# Altium PCB Final decision.PcbDoc
Units mm, origin at the board's own origin, x right, y up, seen from the top; angles counter-clockwise.
Board outline 59.9 x 74 mm, 2 copper layers (Top Layer, Bottom Layer); 53 components, 47 nets, 199 pads, 42 vias.
Unrouted connection lines stored in the file: 110.
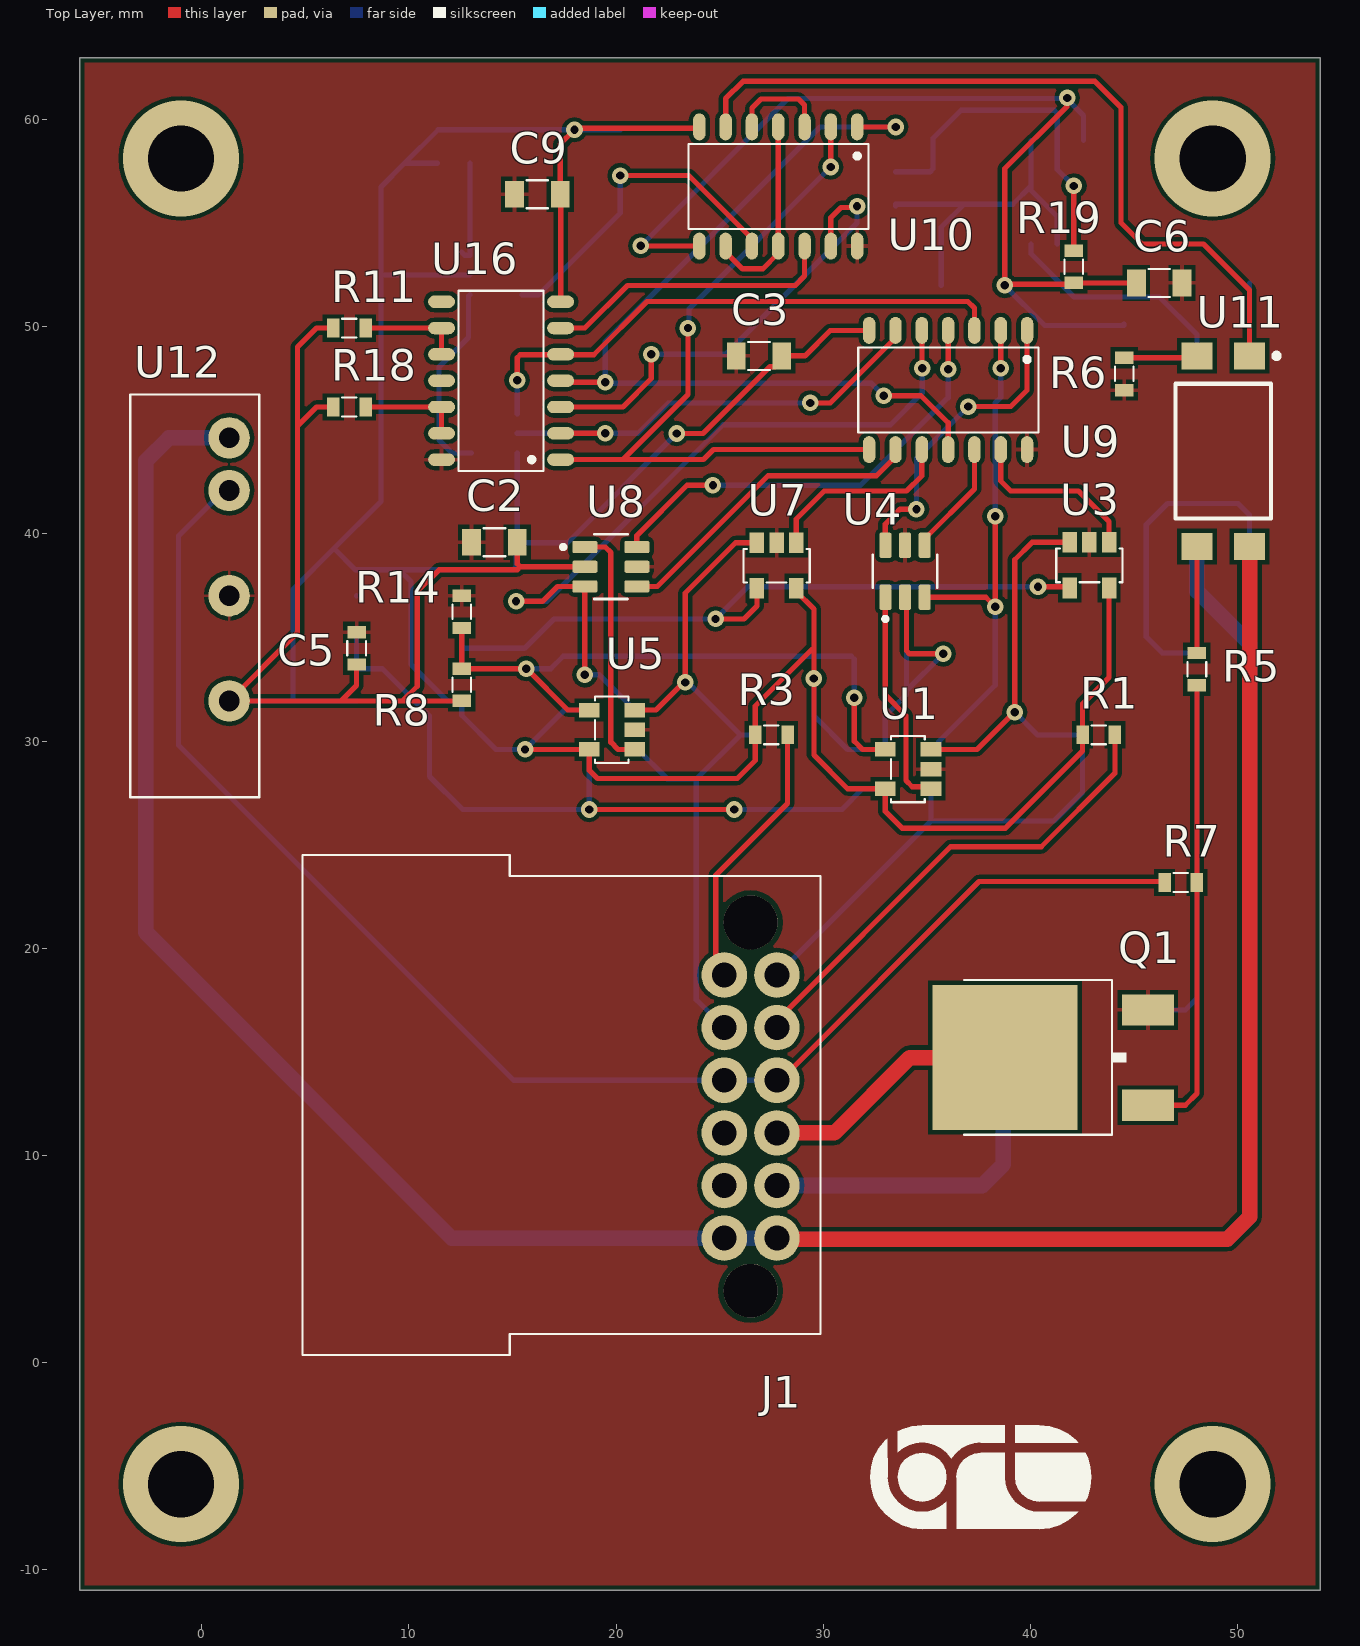
[diagram p0: Top Layer view]
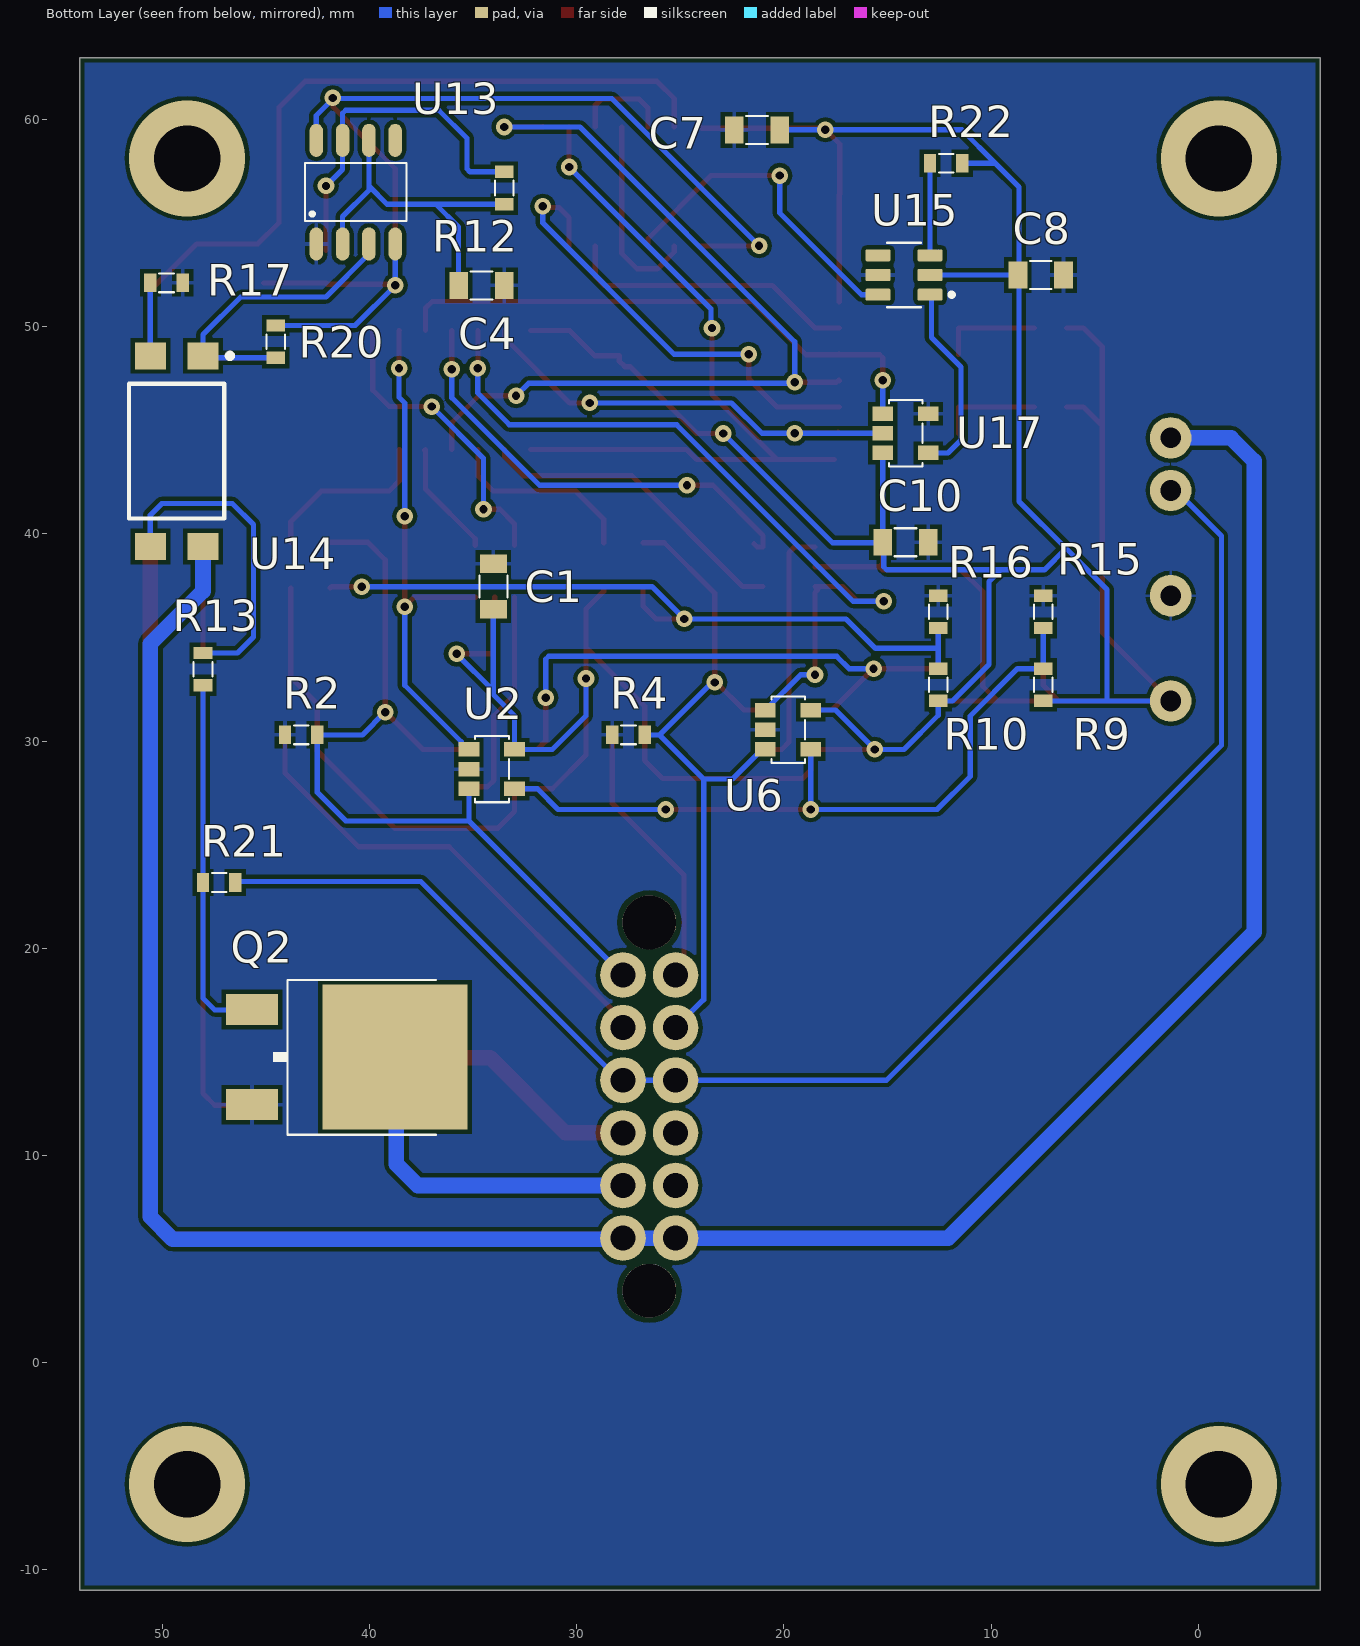
[diagram p1: Bottom Layer view, seen from below]

## Layer stack, top to bottom
Top Solder: solder mask 0.0102, Solder Resist, Dk 3.5
Top Layer: signal copper 0.0356
Dielectric 1: dielectric 0.32, FR-4, Dk 4.8
Bottom Layer: signal copper 0.0356
Bottom Solder: solder mask 0.0102, Solder Resist, Dk 3.5

## Board outline
-5.9,-11 -5.9,63 54,63 54,-11

## Design rules (kind name [scope] priority, off if disabled: settings)
AcuteAngle [All] p1: minimum=3.50000000000000E+0001 checktracksonly=FALSE
BoardOutlineClearance "BoardOutlineClearance 1" [All] p1: gap=0.25 ignorepadtopadclearanceinfootprint=FALSE except(0: Arc-SplitContinuation Track-SplitContinuation SMDPad-SplitContinuation THPad-SplitContinuation Via-SplitContinuation Fill-SplitContinuation Poly-SplitContinuation Region-SplitContinuation Text-SplitContinuation) // Milling
Clearance "Clearance-1 1/2 Oz" [All] p1: gap=0.125 ignorepadtopadclearanceinfootprint=FALSE except(0.2: Arc-Fill Arc-Poly Track-Fill Track-Poly SMDPad-SMDPad SMDPad-Fill SMDPad-Poly THPad-Fill THPad-Poly Via-Fill Via-Poly Fill-Fill Fill-Poly Poly-Poly Poly-Region Poly-Text; 0.25: Arc-Hole Track-Hole SMDPad-Hole THPad-Hole Via-Hole Fill-Hole Poly-Hole Region-Hole Text-Hole) // Standart
ComponentClearance [All] p1: gap=0.1 collisioncheckmode=3 verticalgap=0.1 showdistances=FALSE
DiffPairsRouting "DiffPairsRouting 1/2 Oz" [All] p1: maxlimit=0.254 minlimit=0.125 mostfreqgap=0.254 toplayer_minwidth=0.125 toplayer_maxwidth=0.381 toplayer_prefwidth=0.381 bottomlayer_minwidth=0.125 bottomlayer_maxwidth=0.381 bottomlayer_prefwidth=0.381 maxuncoupledlength=12.7
HoleSize "Minimum HoleSize" [IsPad] p1: absolutevalues=TRUE maxlimit=5.9 minlimit=0.6 maxpercent=80.000 minpercent=20.000
HoleSize "Minimum HoleSize VIA 1" [IsVia] p2: absolutevalues=TRUE maxlimit=5.9 minlimit=0.3 maxpercent=80.000 minpercent=20.000 // Standart
HoleToHoleClearance Hole2HoleClearance [All] p1: gap=0.25 allowstackedmicrovias=FALSE
MinimumAnnularRing "Minimum AR VIA Standart" [All] p1: minimumring=0.15
MinimumAnnularRing "Minimum AR PAD Standart" [All] p2: minimumring=0.2
MinimumSolderMaskSliver "SolderMask Bridge Standart" [All] p1: minsoldermaskwidth=0.15 // All Masks
PlaneClearance "PlaneClearance-1 1/2 Oz" [All] p1: clearance=0.2 // Standart
PlaneConnect "TermalConnect-1 1/2 Oz" [All] p1: planeconnectstyle=Relief reliefexpansion=0.2 reliefentries=4 reliefconductorwidth=0.2 reliefairgap=0.2 // Standart
PolygonConnect "PolygonConnect-1 1/2 Oz" [All] p1: thpad.connectstyle=Relief thpad.reliefconductorwidth=0.15 thpad.reliefentries=4 thpad.polygonreliefangle="90 Angle" thpad.airgapwidth=0.2 smdpad.connectstyle=Relief smdpad.reliefconductorwidth=0.2 smdpad.reliefentries=4 smdpad.polygonreliefangle="90 Angle" smdpad.airgapwidth=0.2 via.connectstyle=Direct via.reliefconductorwidth=0.254 via.reliefentries=4 via.polygonreliefangle="90 Angle" via.airgapwidth=0.254 // Standart
RoomDefinition PART_A1 [InComponentClass('PART_A1')] p1: confinementstyle=ConfineIn formatcopy=TRUE lockcomponents=FALSE outline 30.525,26.7 44.7,26.7 44.7,41.575 30.525,41.575
RoomDefinition PART_A2 [InComponentClass('PART_A2')] p2: confinementstyle=ConfineIn formatcopy=TRUE lockcomponents=FALSE outline 10.2,28.8 30.125,28.8 30.125,41.575 10.2,41.575
RoutingCorners [All] p1 off: cornerstyle=45-Degree minsetback=2.54 maxsetback=2.54
RoutingVias [All] p1: holewidth=0.4 width=0.8 viastyle="Through Hole" minholewidth=0.3 minwidth=0.6 maxholewidth=5.9 maxwidth=8.9
SilkToSilkClearance Silk2SilkClearance [All] p1 off: silktosilkclearance=0.15
SilkToSolderMaskClearance Silk2SolderMaskClearance [IsPad] p1 off: minsilkscreentomaskgap=0.15 clearancetoexposedcopper=TRUE
SolderMaskExpansion SolderMaskExpansion-1 [All] p1: expansion=0.05 istentingtop=FALSE // Standart
UnRoutedNet [All] p1: checkbadconnections=TRUE
Width [InNet('24V')] p1: maxlimit=1 minlimit=0.5 preferedwidth=0.75
Width "Width 1/2 Oz" [All] p2: maxlimit=10 minlimit=0.125 preferedwidth=0.254 checkconnectedcopper=TRUE
19 further rules are at their usual default settings.

## Classes and differential pairs
net class Sgn_Out[1..2]: Sgn_Out1 Sgn_Out2
net class Sgn_In[1..2]: Sgn_In1 Sgn_In2
component class PART_A2: C2 R3 R4 U5 U6 U7 U8
component class PART_A1: C1 R1 R2 U1 U2 U3 U4
channel class RelayDetect2: PART_1 PART_2
net class 4V_Comp(Inv)[1..2]: 4V_Comp(Inv)1 4V_Comp(Inv)2
net class 3V_Comp[1..2]: 3V_Comp1 3V_Comp2
net class 3V_Comp(Inv)[1..2]: 3V_Comp(Inv)1 3V_Comp(Inv)2
net class 2V_Comp[1..2]: 2V_Comp1 2V_Comp2
component class Reciever: C3 U9
net class Red_On[1..2]: Red_On1 Red_On2
net class Green_On[1..2]: Green_On1 Green_On2
component class Sheet1: "  " C4 C9 C10 J1 J2 Q1 Q2 R5 R6 R7 R8 R9 R11 R12 R13 R14 R15 R16 R17 R18 R19 R20 R21 R22 U10 U11 U12 U13 U14 U15 U16 U17

## Components (designator, comment, footprint, x,y, rotation, side; value= is the part's Value field where it differs from the comment)
C1 "0.1uF" "0805 Capicator" 34.025,37.459 r90 bottom (schematic designator C8)
C2 "0.1uF" "0805 Capicator" 14.125,39.6 r180 top (schematic designator C8)
C3 "0.1uF" "0805 Capicator" 26.9,48.6 r180 top (schematic designator C7)
C4 "Cap 10nF (0805)" "0805 Capicator" 34.6,52 r180 bottom (schematic designator C1)
C5 "4.7uF" "0603 Capicator" 7.475,34.48 r270 top (schematic designator C2)
C6 "Cap 10nF (0805)" "0805 Capicator" 46.22,52.12 r180 top (schematic designator C3)
C7 "0.1uF" "0805 Capicator" 21.3,59.5 r0 bottom (schematic designator C4)
C8 "0.1uF" "0805 Capicator" 7.6,52.5 r180 bottom (schematic designator C5)
C9 "0.1uF" "0805 Capicator" 16.2,56.4 r180 top (schematic designator C6)
C10 "0.1uF" "0805 Capicator" 14.125,39.6 r180 bottom (schematic designator C7)
J1 "Conn6x2" Conn6x2(Molex) 26.495,21.25 r270 top
Q1 "MOSFET-N" "D-Pak (TO-252AA)" 45.675,14.725 r90 top (schematic designator Q2)
Q2 "MOSFET-N" "D-Pak (TO-252AA)" 45.675,14.75 r270 bottom (schematic designator Q1)
R1 "1k" "0603 Resistor" 43.3,30.3 r180 top
R2 "1k" "0603 Resistor" 43.3,30.3 r180 bottom
R3 "1k" "0603 Resistor" 27.5,30.3 r180 top (schematic designator R1)
R4 "1k" "0603 Resistor" 27.5,30.3 r180 bottom (schematic designator R2)
R5 "16k" "0603 Resistor" 48.04,33.475 r270 top (schematic designator R3)
R6 "1k" "0603 Resistor" 44.525,47.725 r90 top (schematic designator R5)
R7 "8.2k" "0603 Resistor" 47.26,23.175 r0 top (schematic designator R6)
R8 "1k" "0603 Resistor" 12.55,32.72 r90 top (schematic designator R9)
R9 "2k" "0603 RESISTOR" 7.475,32.72 r270 bottom (schematic designator R12)
R10 "3k" "0603 RESISTOR" 12.55,32.72 r270 bottom (schematic designator R13)
R11 "1k" "0603 Resistor" 7.13,49.94 r180 top
R12 "22k" "0603 Resistor" 33.5,56.7 r270 bottom (schematic designator R4)
R13 "16k" "0603 Resistor" 48.04,33.475 r270 bottom (schematic designator R17)
R14 "3k9" "0603 RESISTOR" 12.55,36.24 r270 top (schematic designator R15)
R15 "3k" "0603 RESISTOR" 7.475,36.24 r270 bottom (schematic designator R16)
R16 "2k" "0603 Resistor" 12.55,36.24 r270 bottom (schematic designator R21)
R17 "1k" "0603 Resistor" 49.8,52.12 r0 bottom (schematic designator R18)
R18 "1k" "0603 Resistor" 7.13,46.13 r180 top (schematic designator R20)
R19 "5.6" "0603 Resistor" 42.1,52.9 r90 top (schematic designator R8)
R20 "22k" "0603 Resistor" 44.525,49.285 r270 bottom (schematic designator R14)
R21 "8.2k" "0603 Resistor" 47.26,23.175 r0 bottom (schematic designator R19)
R22 "1k" "0603 Resistor" 12.165,57.9 r180 bottom (schematic designator R10)
U1 "Comparator" SOT-23-5 35.2,28.65 r90 top (schematic designator U3)
U2 "Comparator" SOT-23-5 35.2,28.65 r270 bottom (schematic designator U6)
U3 "Comparator" SOT-23-5 42.85,39.595 r180 top (schematic designator U7)
U4 "Inv" SOT236 33.95,38.2 r90 top (schematic designator U5)
U5 "Comparator" SOT-23-5 20.9,30.55 r90 top (schematic designator U3)
U6 "Comparator" SOT-23-5 20.9,30.55 r270 bottom
U7 "Comparator" SOT-23-5 27.75,39.575 r180 top
U8 "Inv" SOT236 19.75,38.418 r0 top (schematic designator U5)
U9 "2AND" SOIC-14 39.84,49.825 r180 top (schematic designator U2)
U10 "2AND" SOIC-14 31.64,59.65 r180 top (schematic designator U4)
U11 "Opt" FAIR-MDIP-4_V 49.31,44 r270 top (schematic designator U10)
U12 "DC/DC" SIP7 1.325,44.64 r0 top (schematic designator U13)
U13 "NE555P" SOIC-8 42.57,54 r90 bottom (schematic designator U15)
U14 "Opt" FAIR-MDIP-4_V 49.31,44 r270 bottom
U15 "Inv" SOT236 14.2,52.5 r0 bottom (schematic designator U8)
U16 "2XOR" SOIC-14 17.325,43.59 r90 top (schematic designator U1)
U17 "NOR" SOT-23-5 15.225,44.86 r270 bottom (schematic designator U11)
? "Comment" BRT_Log 37.675,-5.5 r0 top

## Footprints (in the part's own frame and the unit in brackets; to place one, negate y for a bottom-side part, rotate by r counter-clockwise, add the part's x,y. Pads: shape width x height; smd on the part's side, far side on the other; paste and mask are expansions set on the pad)
"0603 Capicator" [mm]
  rect 0.6x0.9 smd: 1(-0.78,0) 2(0.78,0)
  silkscreen extent -0.35,-0.45 0.35,0.45, body extent -0.82,-0.45 0.88,0.45, height 0.9
"0603 Resistor" [mm]
  rect 0.6x0.9 smd: 1(-0.78,0) 2(0.78,0)
  silkscreen extent -0.35,-0.45 0.35,0.45, body extent -0.85,-0.45 0.85,0.45, height 0.55
"0603 RESISTOR" [mm]
  rect 0.6x0.9 smd: 1(-0.78,0) 2(0.78,0)
  silkscreen extent -0.35,-0.45 0.35,0.45, body extent -0.85,-0.45 0.85,0.45, height 0.55
"0805 Capicator" [mm]
  rect 0.9x1.3 smd: 1(-1.1,0) 2(1.1,0)
  silkscreen extent -0.52,-0.67 0.53,0.67, body extent -1.05,-0.67 1.05,0.68, height 0.75
BRT_Log [mm]
  silkscreen extent -5.42,-2.54 5.27,2.48
Conn6x2(Molex) [mm]
  round 2.2 hole 1.2: 1(2.54,1.27) 2(5.08,1.27) 3(7.62,1.27) 4(10.16,1.27) 5(12.7,1.27) 6(15.24,1.27) 7(2.54,-1.27) 8(5.08,-1.27) 9(7.62,-1.27) 10(10.16,-1.27) 11(12.7,-1.27) 12(15.24,-1.27)
  round 2.6 hole 2.6 unplated: A(0,0) A(17.78,0)
  silkscreen extent -3.25,-21.63 20.87,3.37, body extent -3.15,-31.93 20.79,3.23, height 22.06
"D-Pak (TO-252AA)" [mm]
  rect 1.5x2.5 smd: 1(-2.3,0) 3(2.3,0)
  rect 7x7 smd: 2(0,6.9)
  silkscreen extent -3.72,1.02 3.75,8.88, body extent -3.38,-0.65 3.35,9.45, height 2.37
FAIR-MDIP-4_V [mm]
  rect 1.3x1.5 smd: 1(-4.6,1.27) 2(-4.6,-1.27) 3(4.6,-1.27) 4(4.6,1.27)
  silkscreen extent -4.72,-2.3 3.25,2.7, body extent -5.08,-2.3 5.08,2.3, height 3.85
SIP7 [mm]
  round 2 hole 1: 1(0,0) 2(0,-2.54) 4(0,-7.62) 6(0,-12.7)
  silkscreen extent -4.77,-17.35 1.45,2.1, body extent -4.7,-17.27 1.39,2.03, height 10.16
SOIC-8 [mm]
  oval 1.6x0.65 smd: 1(0,0) 2(0,-1.27) 3(0,-2.54) 4(0,-3.81) 5(5,-3.81) 6(5,-2.54) 7(5,-1.27) 8(5,0)
  silkscreen extent 1.1,-4.35 3.9,0.55, body extent -0.36,-4.35 5.41,0.55, height 1.45
SOIC-14 [mm]
  oval 0.6x1.3 smd paste+0 mask+0.1: 1(0,0) 2(1.27,0) 3(2.54,0) 4(3.81,0) 5(5.08,0) 6(6.35,0) 7(7.62,0) 8(7.62,5.75) 9(6.35,5.75) 10(5.08,5.75) 11(3.81,5.75) 12(2.54,5.75) 13(1.27,5.75) 14(0,5.75)
  silkscreen extent -0.55,0.82 8.15,4.93, body extent -0.52,-0.12 8.13,5.87, height 1.75
SOT236 [mm]
  rrect25% 1.21x0.58 smd: 1(-1.255,0.95) 2(-1.255,0) 3(-1.255,-0.95) 4(1.255,-0.95) 5(1.255,0) 6(1.255,0.95)
  silkscreen extent -2.4,-1.56 0.8,1.56, body extent -1.4,-1.45 1.4,1.45, height 1.45
SOT-23-5 [mm]
  rect 0.7x1 smd mask+0.045: 1(-0.95,0) 2(0,0) 3(0.95,0) 4(0.95,2.2) 5(-0.95,2.2)
  silkscreen extent -1.6,0.3 1.6,1.92, body extent -1.5,-0.15 1.5,2.35, height 1.1

## Part data
C1 C2 C3 C7 C8 C9 C10: library part "Cap 0.1uF (0805)", "0.1uF X7R 50V 10% 0805", Manufacturer="Murata Manufacturing", Part Number=GRM21BR71E104KA01L, ComponentLink1Description=Chip&Dip, ComponentLink1URL=https://www.chipdip.ru/product/grm21br71e104ka01l, Type=Capacitor
C4 C6: library part CMP-020-0006-1, "0805 X7R 10nF 100V 10%", Manufacturer="Murata Manufacturing", Part Number=GRM21BR72A103KA01L, Component Type=Standard, ComponentLink1Description=Chip&Dip, ComponentLink1URL=https://www.chipdip.ru/product/grm21br72a103ka01l, Design Item ID="Cap 10nF (0805)", Pins=2, Source=Karen_Components.SchLib, Type=Capacitor
C5: library part "Cap 4.7uF (0603)", "4.7uF X5R 6.3V 10% 0603", Manufacturer="Murata Manufacturing", Part Number=GRM188R60J475KE19D, ComponentLink1Description=Chip&Dip, ComponentLink1URL=https://www.chipdip.ru/product/grm185r60g475me15d, Type=Capacitor
J1: library part "Conn 12 [Stack64]", "Stac64 Right-Angle Header Assembly, 12 Circuits, Polarization A, Black, Tray / Current - Maximum per Contact 10.0A / Voltage - Maximum 500V", ComponentLink1Description=Molex, ComponentLink1URL=https://www.molex.com/molex/products/part-detail/pcb_headers/0346910120, ComponentLink2Description=DataSheet, ComponentLink2URL=https://www.molex.com/webdocs/datasheets/pdf/en-us/0346910120_PCB_HEADERS.pdf
Q1 Q2: library part "MOSFET-N [IRLR]", "Trans MOSFET N-CH Si 55V 89A 3-Pin(2+Tab) DPAK Tube", Manufacturer="International Rectifier", Part Number=IRLR3705ZTRPBF, ComponentLink1Description=DataSheet, ComponentLink1URL=https://static.chipdip.ru/lib/292/DOC000292789.pdf, ComponentLink2Description=Chip&Dip, ComponentLink2URL=https://www.chipdip.ru/product/irlr3705zpbf, Type=Transistor
R1 R2 R3 R4 R6 R8 R11 R17 R18 R22: library part "Res 1k (0603)", "0.1W 0603 1k, 1%", Manufacturer=Taiwan, Part Number=RC0603FR-071KL, ComponentLink1Description=Chip&Dip, ComponentLink1URL=https://www.chipdip.ru/product0/9000079676, Type=Resistor
R5 R13: library part "Res 16k (0603)", "0.1W 0603 16k, 1%", Manufacturer=Taiwan, Part Number=RC0603FR-0716KL, ComponentLink1Description=Chip&Dip, ComponentLink1URL=https://www.chipdip.ru/product0/9000079741, ComponentLink2Description=Datasheet, ComponentLink2URL=https://static.chipdip.ru/lib/788/DOC004788200.pdf
R7 R21: library part "Res 8.2k (0603)", "0.1W 0603 8.2k, 1%", Manufacturer=Taiwan, Part Number=RC0603FR-078R2L, ComponentLink1Description=Chip&Dip, ComponentLink1URL=https://www.chipdip.ru/product0/9000079556, ComponentLink2Description=Datasheet, ComponentLink2URL=ttps://static.chipdip.ru/lib/788/DOC004788200.pdf
R9 R16: library part "Res 2k (0603)", "0.1W 0603 2k, 1%", Manufacturer=Taiwan, Part Number=RC0603FR-072KL, ComponentLink1Description=Chip&Dip, ComponentLink1URL=https://www.chipdip.ru/product0/9000079719, Type=Resistor
R10 R15: library part "Res 3k (0603)", "0.1W 0603 3k, 1%", Manufacturer=Taiwan, Part Number=RC0603FR-073KL, ComponentLink1Description=Chip&Dip, ComponentLink1URL=https://www.chipdip.ru/product0/9000079723, Type=Resistor
R12 R20: library part "Res 22k (0.1W 0603 22k, 1%)", "0.1W 0603 22k, 1%"
R14: library part "Res 3.9k (0603)", "0.1W 0603 3.9k, 1%", Manufacturer=Taiwan, Part Number=RC0603FR-073K9L, ComponentLink1Description=Chip&Dip, ComponentLink1URL=https://www.chipdip.ru/product0/9000079726, Type=Resistor
R19: library part "Res 5.6k (0.1W 0603 5.6k, 1%)", "0.1W 0603 5.6k, 1%"
U1 U2 U3 U5 U6 U7: library part "Comparator [LMV]", "LMV7219 7-ns 2.7-V to 5-V Comparator with Rail-to-Rail Output", Manufacturer="Texas Instruments", Part Number=LMV7219M5X/NOPB, ComponentLink1Description=DataSheet, ComponentLink1URL=http://www.ti.com/lit/ds/symlink/lmv7219.pdf, ComponentLink2Description=Mouser, ComponentLink2URL=https://ru.mouser.com/ProductDetail/Texas-Instruments/LMV7219M5X-NOPB?qs=sGAEpiMZZMuayl%2FEk2kXcbEcxwmoPguctVQUIBgrLJY%3D, Type=IC
U4 U8 U15: library part Inverter, Chip&Dip=https://www.chipdip.ru/product/sn74lvc2g04dbvr-2
U9 U10: library part "4 (2AND)", Chip&Dip=https://www.chipdip.ru/product/sn74ac08dr
U11 U14: library part "Optocoupler [FOD817B]", "Phototransistor Optocoupler, 4 us Rise, 3 us Fall, 5000 Vrms, -55 to 110 degC, 4-Pin MDIP, RoHS, Tape and Reel", Manufacturer="ON Semiconductor", Part Nomber=FOD817B, ComponentLink1Description=Chip&Dip, ComponentLink1URL=https://www.chipdip.ru/product/fod817b, ComponentLink2Description=DataSheet, ComponentLink2URL=https://static.chipdip.ru/lib/297/DOC000297284.pdf
U12: library part "DC/DC Isolated 5V [TMH]", "The TMH series are ultra miniature, isolated 2 Watt DC/DC-converters in a Single-in-Line  package  (SIP)", Manufacturer="Traco Power", Part Number=TMH2405S, ComponentLink1Description=Chip&Dip, ComponentLink1URL=https://www.chipdip.ru/product/tmh-2405s, ComponentLink2Description=DataSheet, ComponentLink2URL=https://static.chipdip.ru/lib/005/DOC001005854.pdf, Type=IC
U13: "Standard Timer Single 8-Pin PDIP Tube", Case/Package=PDIP, Current Rating=10mA, Frequency=500kHz, High Level Output Current=-200mA, Low Level Output Current=200mA, Manufacturer="Texas Instruments", Max Operating Temperature=70°C, Max Supply Voltage=16V, Min Operating Temperature=0°C, Min Supply Voltage=4.5V, Nominal Supply Current=2mA, Operating Supply Voltage=5V, Package Quantity=50, Quiescent Current=15mA, Category="Clock and Timing", ComponentLink1Description=https://datasheet.ciiva.com/1139/sa555-1139904.pdf?src-supplier=Element14, ComponentLink1URL=https://datasheet.ciiva.com/1139/sa555-1139904.pdf?src-supplier=Element14, ComponentLink2Description=https://datasheet.ciiva.com/19457/904085-19457361.pdf?src-supplier=Jameco, ComponentLink2URL=https://datasheet.ciiva.com/19457/904085-19457361.pdf?src-supplier=Jameco, ComponentLink3Description=https://datasheet.ciiva.com/26325/152184-da-01-en-ne555p-timer-tid-26325915.pdf?src-supplier=Conrad, ComponentLink3URL=https://datasheet.ciiva.com/26325/152184-da-01-en-ne555p-timer-tid-26325915.pdf?src-supplier=Conrad, ComponentLink4Description=https://datasheet.ciiva.com/1147/1764032-1147750.pdf?src-supplier=Newark, ComponentLink4URL=https://datasheet.ciiva.com/1147/1764032-1147750.pdf?src-supplier=Newark, ComponentLink5Description=https://datasheet.ciiva.com/14094/ne555-series-eng-tds-14094950.pdf?src-supplier=Distrelec, ComponentLink5URL=https://datasheet.ciiva.com/14094/ne555-series-eng-tds-14094950.pdf?src-supplier=Distrelec, ComponentLink6Description=https://datasheet.ciiva.com/14274/ne555-14274456.pdf?src-supplier=Avnet, ComponentLink6URL=https://datasheet.ciiva.com/14274/ne555-14274456.pdf?src-supplier=Avnet, ComponentLink7Description=https://datasheet.ciiva.com/15152/getdatasheetpartid-248510-15152620.pdf?src-supplier=Verical, ComponentLink7URL=https://datasheet.ciiva.com/15152/getdatasheetpartid-248510-15152620.pdf?src-supplier=Verical, ComponentLink8Description=https://datasheet.ciiva.com/1233/ne555-1233454.pdf?src-supplier=Digi-Key, ComponentLink8URL=https://datasheet.ciiva.com/1233/ne555-1233454.pdf?src-supplier=Digi-Key, ComponentLink9Description=https://datasheet.ciiva.com/26228/ne555-26228892.pdf?src-supplier=Avnet+Europe, ComponentLink9URL=https://datasheet.ciiva.com/26228/ne555-26228892.pdf?src-supplier=Avnet+Europe, Contact Plating=Gold, Height=4.57mm, Lead Free="Lead Free", Length=9.81mm, Manufacturer Part Number=NE555P, Mount=SMD, Number of Pins=8, Number of Timers/Counters=1, Operating Supply Current=10mA, Packaging=Rail/Tube, Pricing 1="1=0,37000, 10=0,29900, 25=0,27360, 100=0,20350, 250=0,18444, 500=0,15264, 1000=0,11448, 2500=0,10494, 5000=0,10020 (USD)", Radiation Hardening=No, REACH SVHC="No SVHC", RoHS=Yes, RoHS Compliant=Yes, Supplier 1=Digi-Key, Weight=0.015535oz, Width=6.35mm
U16: library part "4 (2XOR)", Chip&Dip=https://www.chipdip.ru/product/74hc86d
U17: Chip&Dip=https://www.chipdip.ru/product/sn74lvc1g02dbvr-2

## Via types
v1: diameter 0.8, hole 0.4, Top Layer to Bottom Layer, 38 vias
v2: diameter 5.6, hole 3.2, Top Layer to Bottom Layer, 4 vias

## Nets (pads, with @x,y where several pads share a name; then routed paths per layer and width w, separated by ;. In a path a pad name is that pad's centre, name@x,y a point inside that pad or via, vN(x,y) a via of type N, cw(c..) or ccw(c..) an arc to the next point about the centre after c; other vN are vias at no path point)
2V: R10.1 R16.2 U3.4 U7.4 | length 35.7
  Top Layer w0.254: v1(24.804,35.9) 26.179,35.9 26.8,36.521 U7.4 ; v1(40.369,37.459) 41.836,37.459 U3.4
  Bottom Layer w0.254: R10.1 12.55,34.48 ; R16.2 12.55,34.48 ; v1(40.369,37.459) 26.363,37.459 v1(24.804,35.9) 17,35.9 15.58,34.48 12.55,34.48
2V_Comp1: U3.1 U9.13 | length 8.6
  Top Layer w0.254: U9.13 38.57,42.555 39.05,42.075 42.325,42.075 43.8,40.6 U3.1
2V_Comp2: U7.1 U9.10 | length 9.3
  Top Layer w0.254: U7.1 28.7,40.725 30.05,42.075 34.025,42.075 34.76,42.81 U9.10
3V: R9.1 R15.2 U2.4 U6.4 | length 35.3
  Top Layer w0.254: v1(18.7,26.7) v1(25.7,26.7)
  Bottom Layer w0.254: R15.2 R9.1 8.713,33.5 11,31.213 11,28.3 12.6,26.7 v1(18.7,26.7) U6.4 ; v1(25.7,26.7) 30.9,26.7 31.9,27.7 U2.4
3V_Comp1: U2.1 U4.3 U9.2 | length 25.3
  Top Layer w0.254: U4.3 37.848,36.945 v1(38.3,36.493) v1(38.3,40.85) ; U9.2 38.573,49.822 38.573,48.002 v1(38.575,48)
  Bottom Layer w0.254: U2.1 35.35,29.6 35.573,29.823 35.573,29.973 38.3,32.7 v1(38.3,36.493) ; v1(38.3,40.85) 38.3,46.325 38.575,46.6 v1(38.575,48)
3V_Comp2: U6.1 U8.3 U9.5 | length 37.9
  Top Layer w0.254: v1(15.175,36.749) 16.449,36.749 17.168,37.468 U8.3 18.35,37.323 18.495,37.178 v1(18.495,33.2) ; U9.5 34.767,49.818 34.767,48.008 v1(34.775,48)
  Bottom Layer w0.254: v1(15.175,36.749) 16.649,36.749 25.175,45.275 33.25,45.275 34.775,46.8 v1(34.775,48) ; v1(18.495,33.2) 19.2,33.2 U6.1
3V_Comp(Inv)1: U4.4 U9.12 | length 5.7
  Top Layer w0.254: U4.4 34.9,39.77 37.3,42.17 U9.12 U9.12@37.338,44.037
3V_Comp(Inv)2: U8.4 U9.9 | length 15.4
  Top Layer w0.254: U8.4 21.991,37.468 27.333,42.81 32.575,42.81 33.49,43.725 U9.9
4V: R8.2 R14.2 U1.4 U5.4 | length 30.7
  Top Layer w0.254: R14.2 R8.2 v1(15.669,33.5) 17.669,31.5 U5.4 ; v1(31.5,32.1) 31.5,30 31.9,29.6 U1.4
  Bottom Layer w0.254: v1(15.669,33.5) 16.85,33.5 17.45,34.1 31.351,34.1 31.5,33.951 v1(31.5,32.1)
4V_Comp(Inv)1: U4.6 U9.1 | length 14.9
  Top Layer w0.254: U4.6 33,40.487 33.713,41.2 v1(34.5,41.2) ; v1(37,46.15) 39.05,46.15 39.84,46.94 U9.1
  Bottom Layer w0.254: v1(34.5,41.2) 34.5,43.65 v1(37,46.15)
4V_Comp(Inv)2: U8.6 U9.4 | length 22.1
  Top Layer w0.254: U8.6@21.447,39.531 21.284,39.368 U8.6 21.005,39.93 23.425,42.35 v1(24.675,42.35) ; v1(36.03,47.95) U9.4
  Bottom Layer w0.254: v1(24.675,42.35) 31.8,42.35 36.03,46.58 v1(36.03,47.95)
5V: C1.1 C2.1 C3.1 C5.2 C7.1 C8.1 C9.1 C10.1 R1.2 R3.2 R8.1 R9.2 R10.2 R11.2 R18.2 R22.2 U1.5 U2.5 U3.5 U4.2 U5.5 U6.5 U7.5 U8.2 U9.7 U10.7 U12.6 U15.2 U16.7 U17.3 | length 242.4
  Top Layer w0.254: R18.2 5.539,46.13 4.625,45.216 ; R11.2 6.28,49.94 5.539,49.94 4.625,49.026 4.625,45.216 ; C5.2 7.475,32.685 6.73,31.94 ; R8.1 9.69,31.94 ; C2.1 15.225,38.568 15.375,38.418 ; v1(15.609,29.6) U5.5 18.7,28.6 19.1,28.2 25.85,28.2 26.72,29.07 R3.2 26.72,31.695 29.446,34.421 ; U16.7 17.325,56.375 C9.1 17.3,58.819 v1(17.995,59.514) 18.063,59.582 23.952,59.582 U10.7 ; U8.2 15.375,38.418 ; v1(22.925,44.85) 24.2,44.85 27.427,48.077 27.677,48.077 27.95,48.35 C3.1@27.95,48.6 ; C3.1 C3.1@27.95,48.6 ; U7.5 28.7,37.225 29.55,36.375 v1(29.55,33.025) 29.55,29.329 31.179,27.7 U1.5 33,26.6 33.8,25.8 38.8,25.8 42.52,29.52 R1.2 R1.2@42.45,30.3 ; U9.7 30.34,49.825 29.115,48.6 C3.1@27.95,48.6 ; U4.2 33.95,36.8 34.025,36.725 34.025,34.363 34.174,34.214 v1(35.795,34.214) ; R1.2@42.45,30.3 42.52,30.37 42.52,31.8 43.8,33.08 U3.5 ; 4.625,45.216 4.625,35.24 U12.6 6.73,31.94 ; 6.73,31.94 9.69,31.94 ; 9.69,31.94 10.4,32.65 10.4,37.22 11.45,38.27 15.226,38.27 15.375,38.418
  Bottom Layer w0.254: U12.6 4.4,31.94 ; R9.2 4.4,31.94 ; R22.2 9.8,57.9 ; R10.2@12.55,31.87 12.55,31.25 14.2,29.6 v1(15.609,29.6) 17.509,31.5 U6.5 ; R10.2 11.86,31.94 10.1,33.7 10.1,37.7 9.53,38.27 ; U15.2 C8.1 C8.1@8.65,52.5 ; U17.3 C10.1 C10.1@15.2,39.575 ; C7.1 20.186,59.514 v1(17.995,59.514) 11.414,59.514 9.8,57.9 ; v1(22.925,44.85) 17.65,39.575 C10.1@15.2,39.575 ; v1(29.55,33.025) 29.55,31.229 31.179,29.6 32.85,29.6 33,29.75 33,31.229 34.025,32.254 34.025,32.444 ; C1.1 34.025,32.444 ; v1(35.795,34.214) 34.025,32.444 ; 4.4,31.94 4.4,37.325 6.385,39.31 ; 6.385,39.31 8.65,41.575 C8.1@8.65,52.5 ; 6.385,39.31 7.425,38.27 9.53,38.27 ; C8.1@8.65,52.5 8.65,56.75 9.8,57.9 ; 9.53,38.27 15.026,38.27 15.175,38.418 15.175,39.55 C10.1@15.2,39.575
24V: J1.6 J1.12 U11.4 U12.1 U14.4 | length 176.2
  Top Layer w0.75: J1.6 27.825,5.95 49.5,5.95 50.58,7.03 U11.4
  Bottom Layer w0.75: U12.1 -1.585,44.64 -2.7,43.525 -2.7,20.775 12.065,6.01 J1.12 J1.6 27.825,5.95 49.5,5.95 50.58,7.03 50.58,34.705 48.04,37.245 U14.4
GND: C1.2 C2.2 C3.2 C4.2 C5.1 C6.1 C7.2 C8.2 C9.2 C10.2 Q1.3 Q2.3 R2.1 R4.1 R6.1 R14.1 R15.1 R16.1 R17.1 U1.2 U2.2 U3.2 U4.5 U5.2 U6.2 U7.2 U8.5 U9.14 U10.14 U12.4 U13.1 U15.5 U16.14 U17.5 | length 0
GND_24V: J1.3 J1.9 R7.1 R21.1 U12.2 | length 94.5
  Top Layer w0.254: J1.3 27.93,13.63 37.525,23.225 46.43,23.225 R7.1
  Bottom Layer w0.254: U12.2 1.075,42.1 -1.125,39.9 -1.125,29.8 15.045,13.63 J1.9 J1.3 27.93,13.63 37.525,23.225 46.43,23.225 R21.1
Green_On1: U9.11 U10.1 U16.4 | length 43
  Top Layer w0.254: U16.4 17.353,47.428 17.455,47.325 v1(19.475,47.325) ; U10.1@31.638,59.652 U10.1 31.641,59.649 v1(33.5,59.648) v1(33.5,59.648) ; v1(32.925,46.675) 34.725,46.675 36.03,45.37 U9.11
  Bottom Layer w0.254: v1(32.925,46.675) 32.327,47.273 19.527,47.273 v1(19.475,47.325) 19.475,49.275 29.848,59.648 v1(33.5,59.648)
Green_On2: U9.8 U10.2 U16.1 | length 35.1
  Top Layer w0.254: U16.1@17.568,43.59 20.33,43.59 ; v1(23.47,49.94) 23.47,46.73 20.33,43.59 ; v1(30.365,57.714) 30.368,57.716 30.368,59.648 U10.2 ; U9.8 24.7,44.075 24.215,43.59 20.33,43.59
  Bottom Layer w0.254: v1(23.47,49.94) 23.52,49.99 23.52,50.869 v1(30.365,57.714)
GREEN_SIGNAL: U10.6 U11.1 | length 37.6
  Top Layer w0.254: U10.6 25.29,61.015 26.125,61.85 43.12,61.85 44.375,60.595 44.375,55.025 45.4,54 48.35,54 50.58,51.77 U11.1
LED_GREEN: J1.4 Q1.2 | length 12.5
  Top Layer w0.75: J1.4 30.54,11.09 34.175,14.725 Q1.2
LED_RED: J1.5 Q2.2 | length 16.6
  Bottom Layer w0.75: J1.5 37.675,8.55 38.7,9.575 38.7,14.675 Q2.2
NetC4_1: C4.1 R12.2 U13.2 U13.6 | length 16.9
  Bottom Layer w0.254: R12.2 33.5,55.85 33.57,55.92 36.805,55.92 ; C4.1 35.7,54.815 36.805,55.92 ; U13.6 40.03,56.8 ; U13.2 41.3,55.32 40.03,56.59 40.03,56.8 ; 36.805,55.92 39.15,55.92 40.03,56.8
NetQ2_1: Q2.1 R13.2 R21.2 | length 17.7
  Bottom Layer w0.254: Q2.1 45.7,17.025 47.475,17.025 48.04,17.59 R21.2 48.04,32.625 R13.2
NetR5_1: R5.1 U11.3 | length 5.1
  Top Layer w0.254: R5.1 U11.3
NetR6_2: R6.2 U11.2 | length 3.6
  Top Layer w0.254: R6.2 47.945,48.505 U11.2
NetR11_1: R11.1 U16.9 U16.10 | length 4.9
  Top Layer w0.254: R11.1 9.43,49.94 U16.9 U16.10
NetR12_1: R12.1 R19.2 U13.7 | length 16.9
  Top Layer w0.254: R19.2 v1(42.1,56.8)
  Bottom Layer w0.254: R12.1 35.151,57.48 35.3,57.629 35.3,59.1 36.656,60.456 41.151,60.456 41.3,60.308 41.3,57.6 v1(42.1,56.8)
NetR13_1: R13.1 U14.3 | length 15.3
  Bottom Layer w0.254: R13.1 46.37,34.255 45.6,35.025 45.6,40.45 46.625,41.475 50.025,41.475 50.58,40.92 U14.3
NetR17_2: R17.2 U14.2 | length 3.5
  Bottom Layer w0.254: U14.2 R17.2
NetR18_1: R18.1 U16.12 U16.13 | length 5
  Top Layer w0.254: R18.1 11.525,46.13 11.55,46.105 U16.12 U16.13
NetR22_1: R22.1 U15.3 | length 4.9
  Bottom Layer w0.254: U15.3@12.539,53.613 12.702,53.45 U15.3 R22.1
NetU1_1: U1.1 U4.1 | length 10.6
  Top Layer w0.254: U4.1 33,32.229 34,31.229 34,28.1 34.3,27.8 35.1,27.8 U1.1
NetU5_1: U5.1 U8.1 | length 11.8
  Top Layer w0.254: U8.1 19.482,39.368 19.75,39.1 19.75,29.95 20.1,29.6 U5.1
NetU10_3: U10.3 U10.5 | length 4.8
  Top Layer w0.254: U10.5 26.56,60.56 27,61 28.8,61 29.1,60.7 U10.3
NetU10_4: U10.4 U10.9 U10.11 | length 9.6
  Top Layer w0.254: U10.9 25.29,53.61 26.1,52.8 27.08,52.8 27.83,53.55 U10.11 U10.4
NetU10_10: U10.10 U15.6 | length 16.3
  Top Layer w0.254: v1(20.2,57.3) 23.51,57.3 26.56,54.25 U10.10
  Bottom Layer w0.254: U15.6 16.25,51.55 20.2,55.5 v1(20.2,57.3) v1@20.3,57.4
NetU10_12: U10.12 U16.6 | length 14.3
  Top Layer w0.254: U16.6 18.49,49.94 20.55,52 28.651,52 29.1,52.449 U10.12
NetU10_13: U10.13 U16.3 | length 22.3
  Top Layer w0.254: U16.3 20.33,46.13 21.7,47.5 v1(21.7,48.67) ; U10.13 30.37,55.27 30.854,55.754 31.576,55.754 v1(31.635,55.814)
  Bottom Layer w0.254: v1(21.7,48.67) 25.29,48.67 31.635,55.015 v1(31.635,55.814)
NetU15_1: U15.1 U17.4 | length 9.5
  Bottom Layer w0.254: U15.1 12.875,51.48 12.875,49.49 11.45,48.065 11.45,44.54 12.08,43.91 U17.4
Out_Low: Q1.1 R5.2 R7.2 | length 22.3
  Top Layer w0.254: Q1.1 47.475,12.425 48.04,12.99 R7.2 R5.2
RED_Final: C6.2 R19.1 R20.1 U10.8 U13.4 U13.8 | length 54.1
  Top Layer w0.254: v1(21.195,53.914) 21.202,53.907 24.013,53.907 U10.8 ; v1(41.777,61.05) 41.75,61.023 41.75,60.619 38.76,57.629 v1(38.76,52) 38.82,52.06 42.04,52.06 R19.1 C6.2
  Bottom Layer w0.254: v1(21.195,53.914) 28.306,61.025 41.752,61.025 v1(41.777,61.05) ; U13.4 v1(38.76,52) 40.695,50.065 44.455,50.065 R20.1@44.525,50.135 ; v1@41.75,61.025 42.57,60.205 U13.8 ; R20.1 R20.1@44.525,50.135
Red_On1: U9.3 U16.5 U17.1 | length 27.1
  Top Layer w0.254: v1(15.225,47.428) 15.225,48.501 15.374,48.65 17.305,48.65 U16.5 17.345,48.65 18.925,48.65 21.5,51.225 36.975,51.225 37.3,50.9 U9.3
  Bottom Layer w0.254: U17.1 v1(15.225,47.428)
Red_On2: U9.6 U16.2 U17.2 | length 22.8
  Top Layer w0.254: U16.2@17.391,44.926 U16.2 v1(19.475,44.86) ; v1(29.375,46.325) 30.34,46.325 33.49,49.475 U9.6
  Bottom Layer w0.254: U17.2 v1(19.475,44.86) 21.06,44.86 22.525,46.325 v1(29.375,46.325)
RED_SIGNAL: R20.2 U13.3 U14.1 | length 14.7
  Bottom Layer w0.254: U13.3 40.03,53.525 42.11,51.445 46.22,51.445 48.04,49.625 U14.1 47.945,48.505 R20.2 R20.2@44.525,48.435
Sgn_In1: J1.1 R2.2 U1.3 U2.3 U3.3 | length 41.6
  Top Layer w0.254: U1.3 37.427,29.6 39.227,31.4 v1(39.245,31.4) 39.245,38.759 40.081,39.595 U3.3 U3.3@41.898,39.597
  Bottom Layer w0.254: J1.1 35.2,26.145 ; U2.3 35.2,26.145 ; v1(39.245,31.4) 40.345,30.3 R2.2 42.52,27.52 41.145,26.145 35.2,26.145
Sgn_In2: J1.8 R4.2 U5.3 U6.3 U7.3 | length 35.4
  Top Layer w0.254: U5.3 21.93,31.5 23.263,32.833 v1(23.339,32.833) 23.339,37.144 25.77,39.575 U7.3
  Bottom Layer w0.254: U6.3 21.05,29.6 22.477,28.173 23.873,28.173 ; v1(23.339,32.833) 23.467,32.833 26,30.3 ; J1.8 23.873,17.522 23.873,28.173 ; R4.2@26.65,30.23 R4.2 26,30.3 ; 23.873,28.173 26,30.3
Sgn_Out1: J1.2 R1.1 | length 23.5
  Top Layer w0.254: J1.2 27.765,16.515 36.15,24.9 40.525,24.9 44.08,28.455 R1.1
Sgn_Out2: J1.7 R3.1 | length 13.2
  Top Layer w0.254: J1.7 25.225,19.237 24.818,19.644 24.818,23.535 28.28,26.997 R3.1
pads on no net: J1.10 J1.11 J1.A U13.5 U15.4 U16.8 U16.11
copper on no net:
  other v2: -0.999,-5.87 48.8,-5.87 -0.999,58.13 48.8,58.13

## Polygon pours and split planes (outlines as drawn)
GND on Bottom Layer "NONET_L-01_P-001" (solid, pour order 2): -7.5,64.1 55.4,64.1 55.4,-11.95 -7.5,-11.95
GND on Top Layer "NONET_L-01_P-001" (solid, remove dead copper, pour order 1): -7.5,64.1 55.4,64.1 55.4,-11.95 -7.5,-11.95

## Silkscreen, mask and mechanical layers (free items; w line width, h text height)
Mechanical 1:
  the board outline again, w0.254